# Altium PCB MotorDriver.PcbDoc
Units mil, origin at the board's own origin, x right, y up, seen from the top; angles counter-clockwise.
Board outline 1496.06 x 1495.77 mil, 4 copper layers (Top Layer, MidLayer1, MidLayer2, Bottom Layer); 75 components, 49 nets, 241 pads, 83 vias.
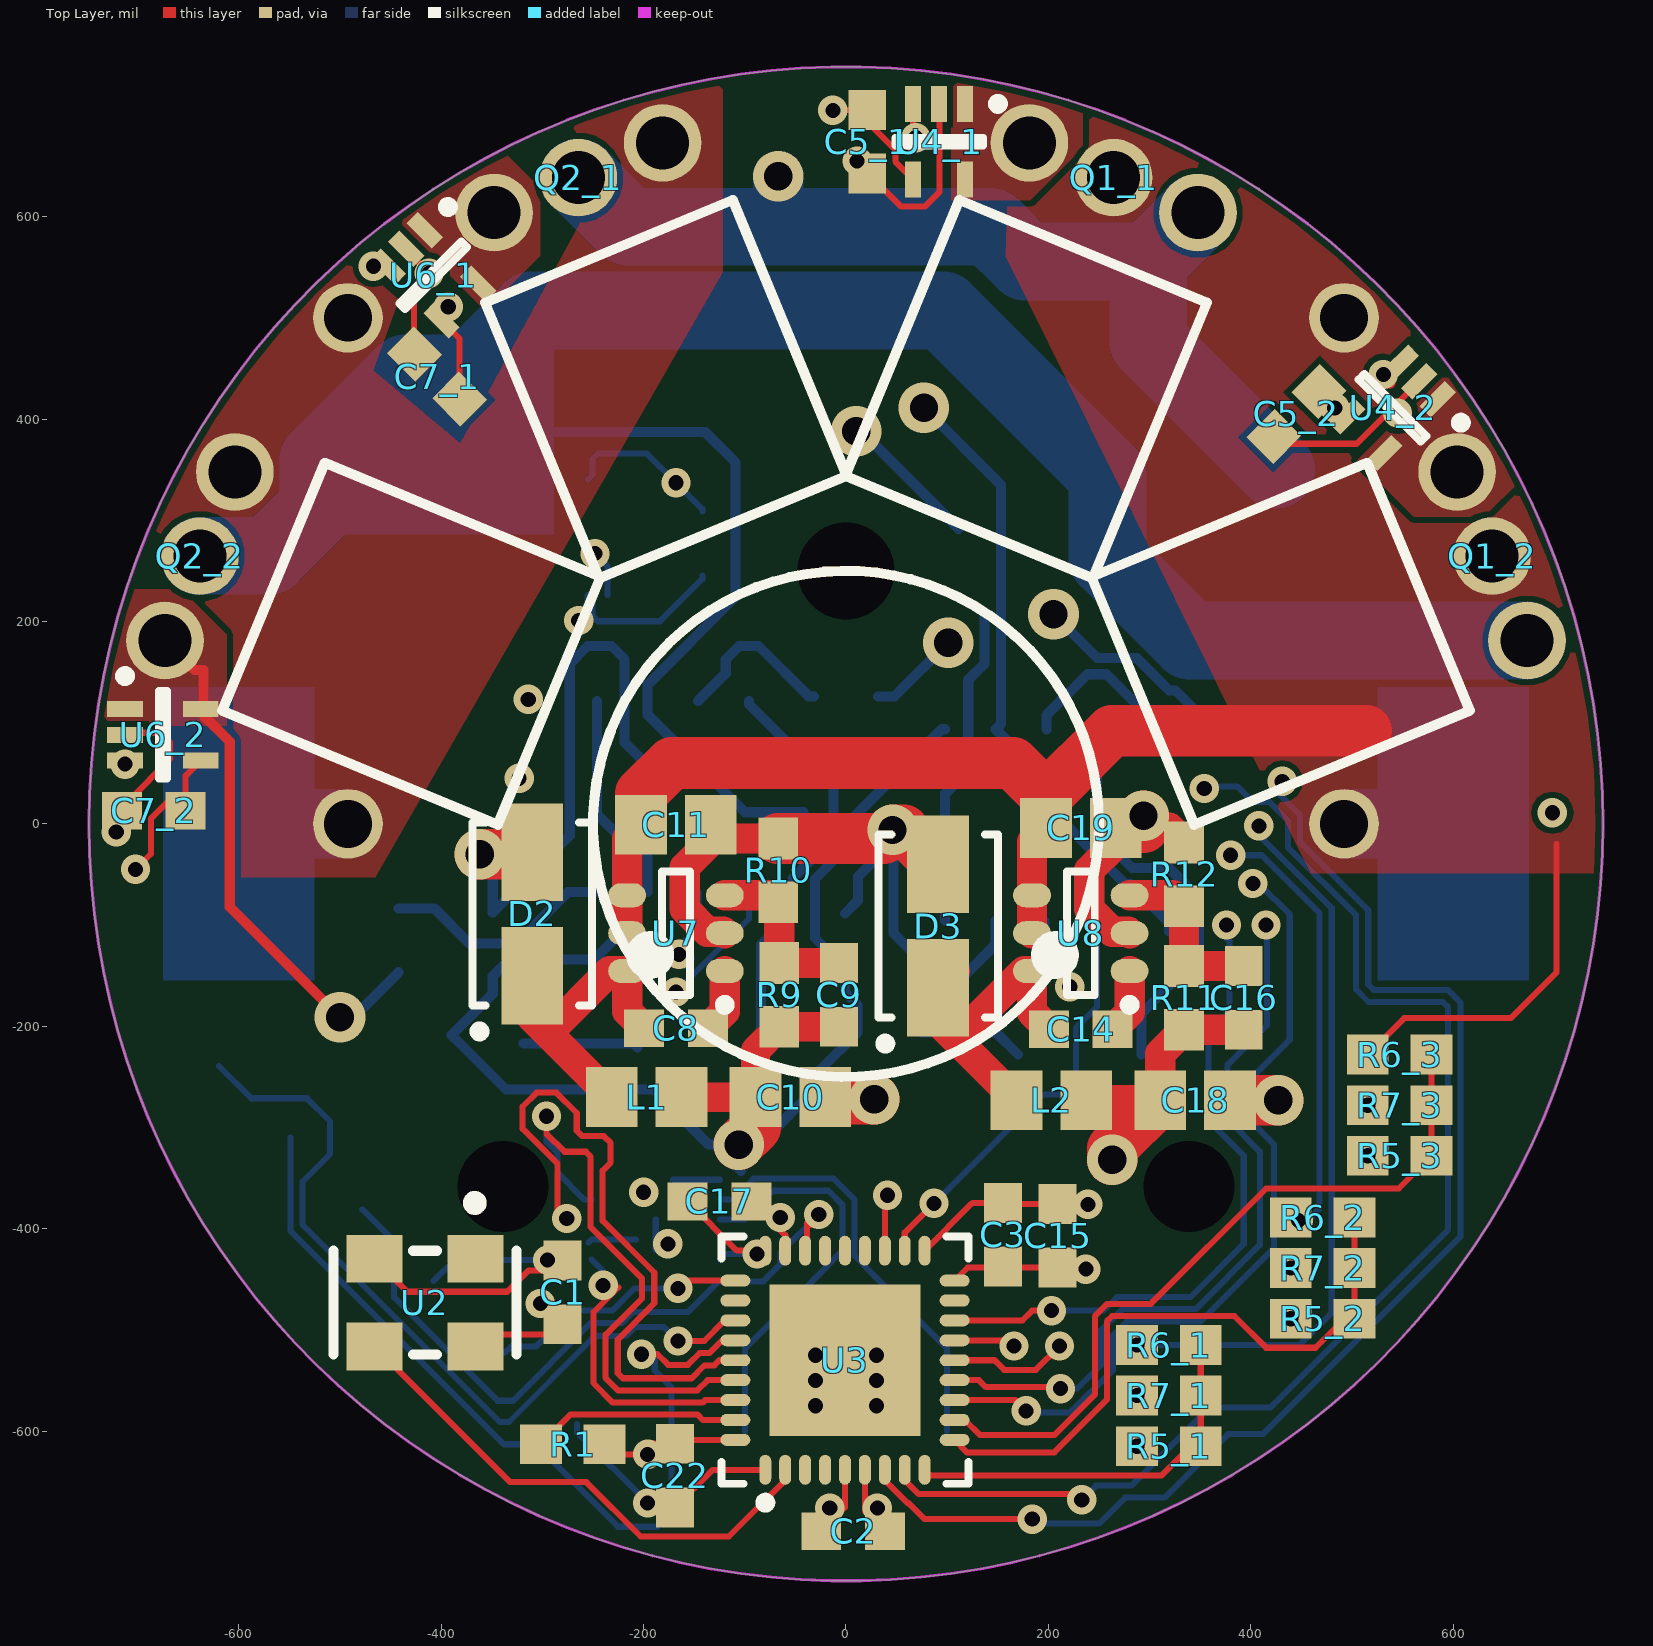
[diagram p0: Top Layer view]
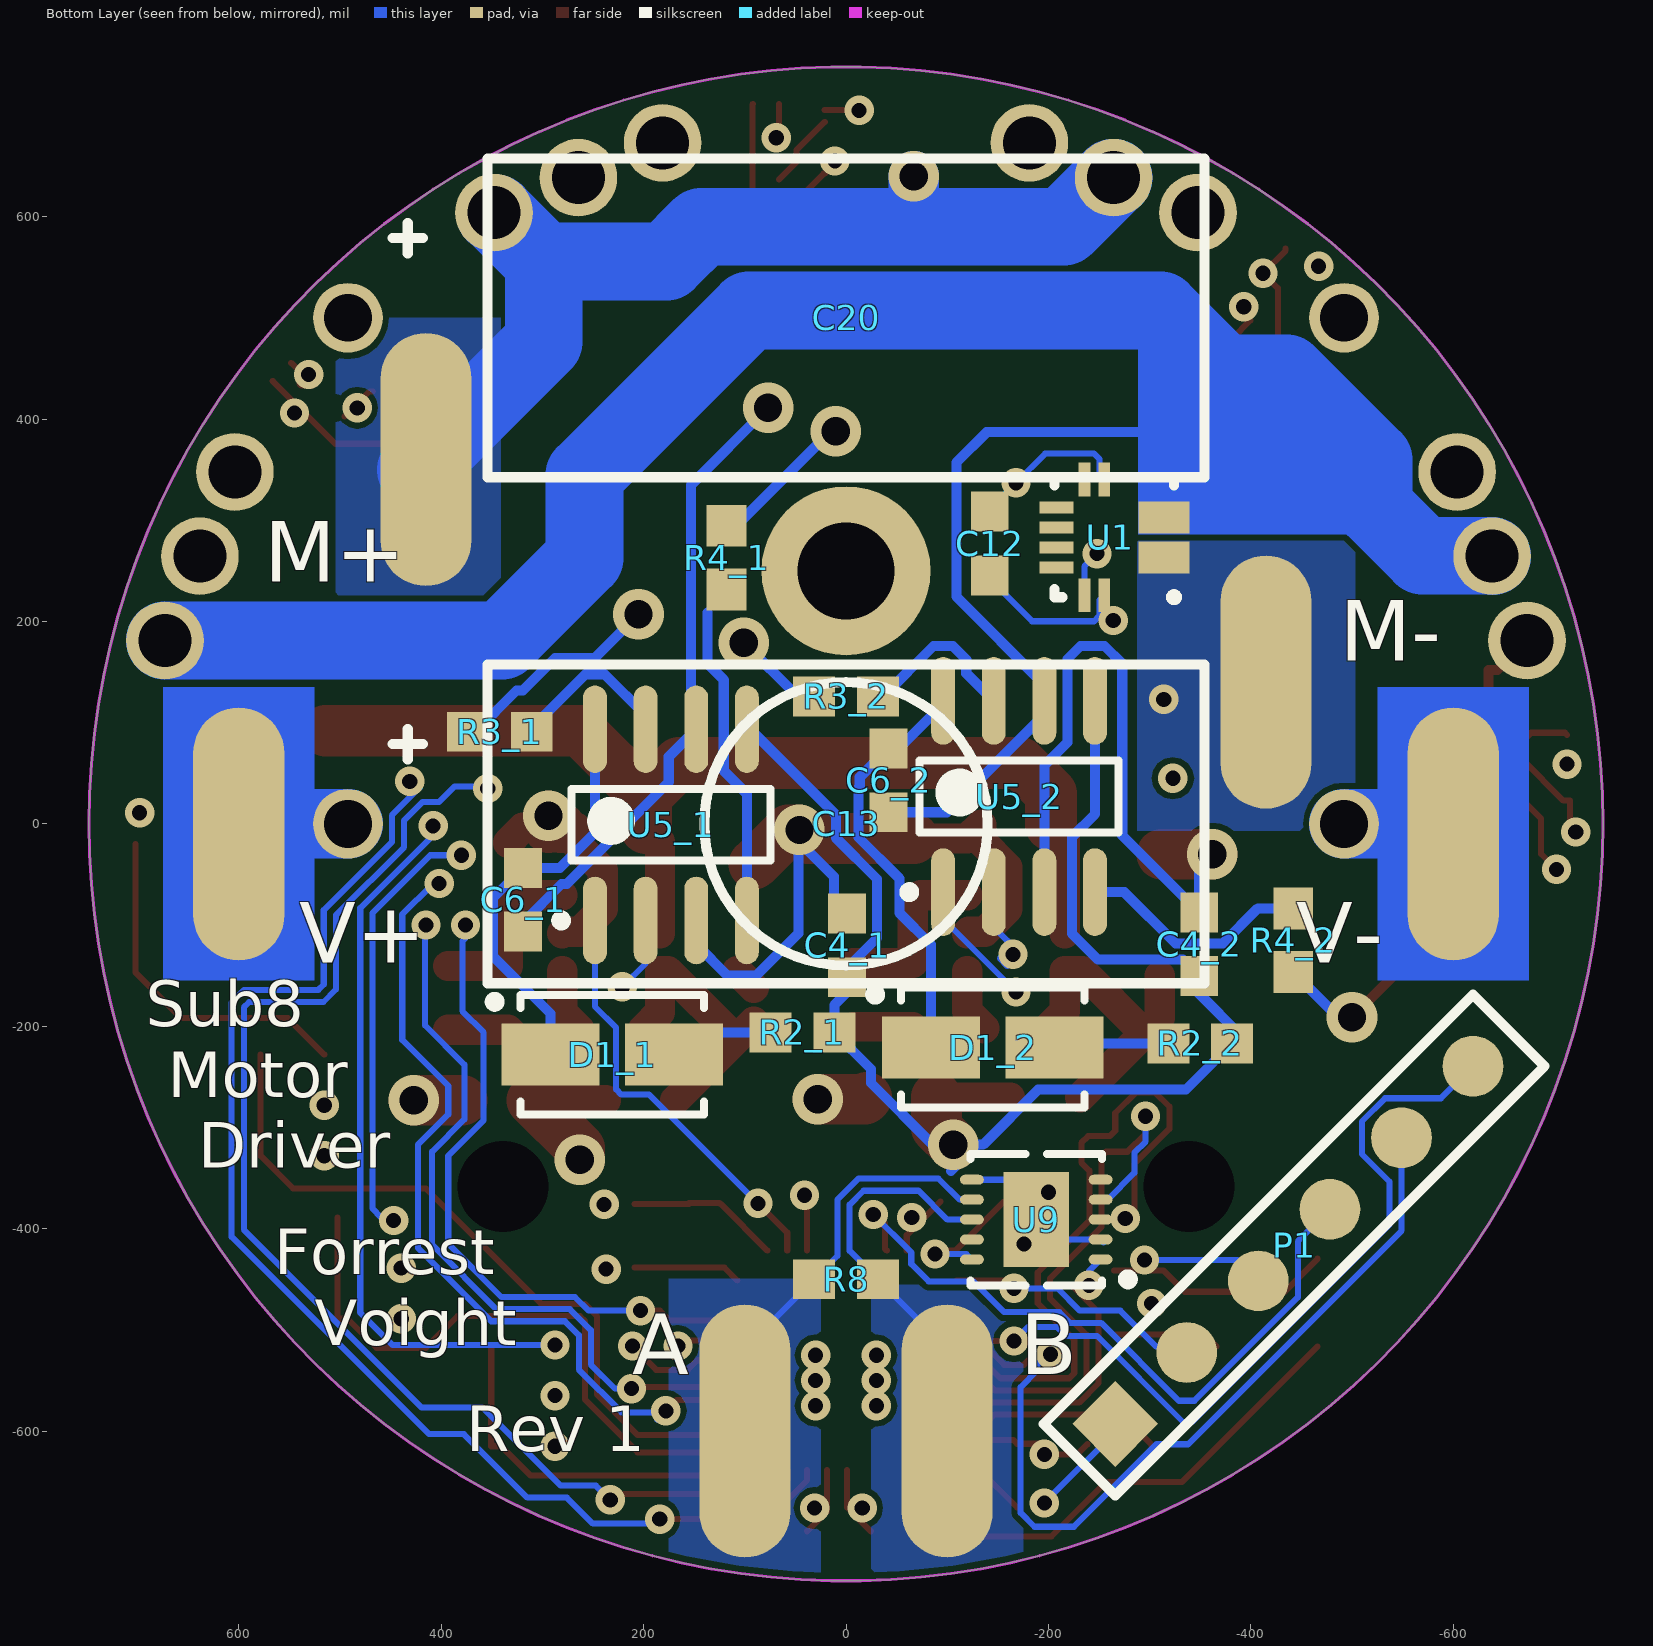
[diagram p1: Bottom Layer view, seen from below]
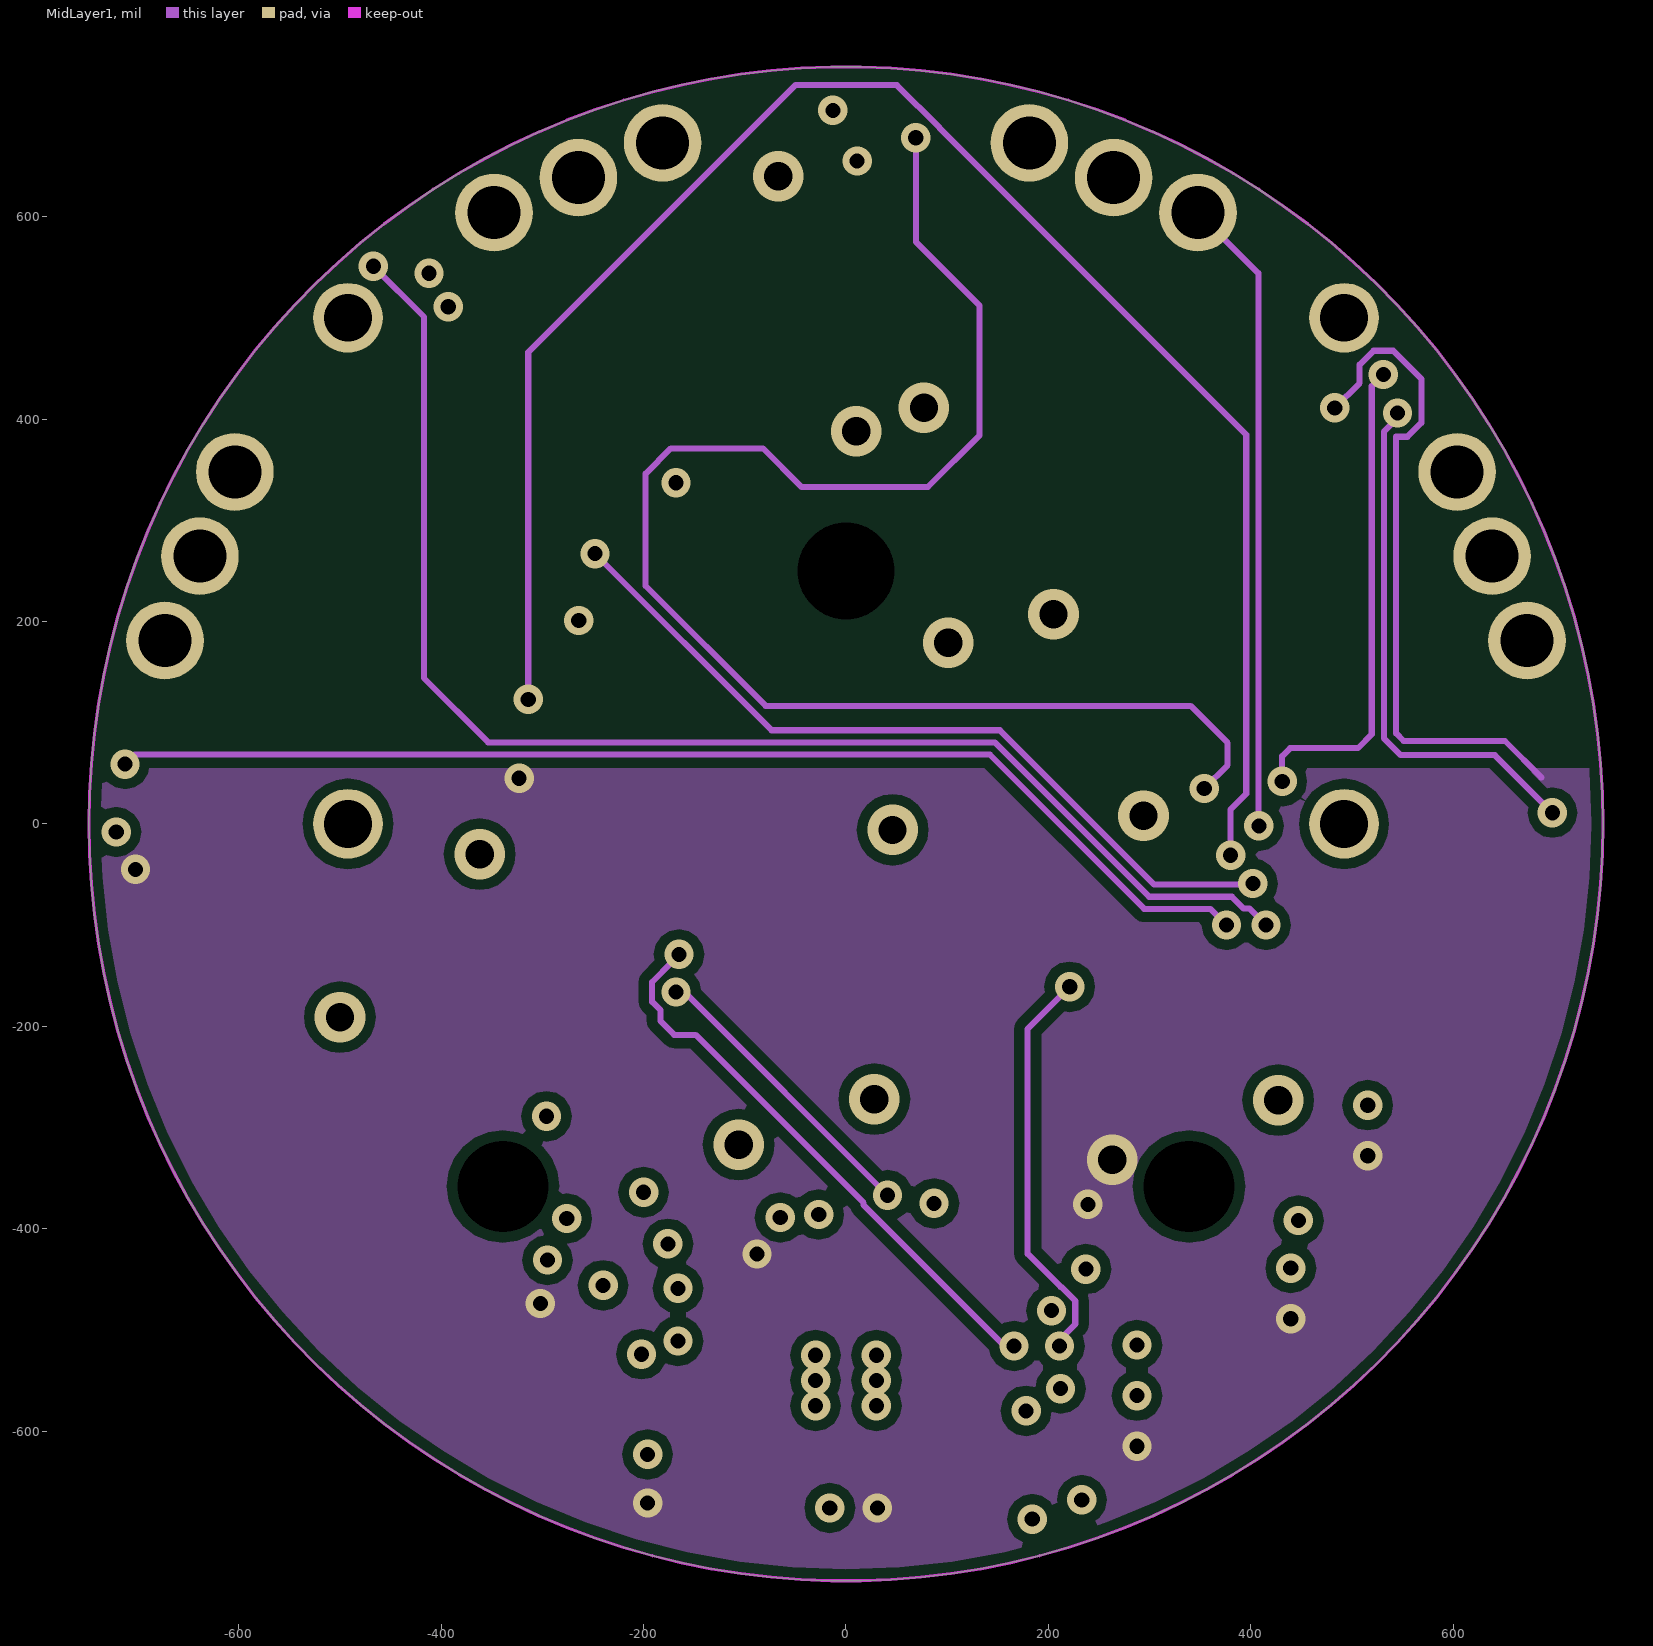
[diagram p2: MidLayer1]
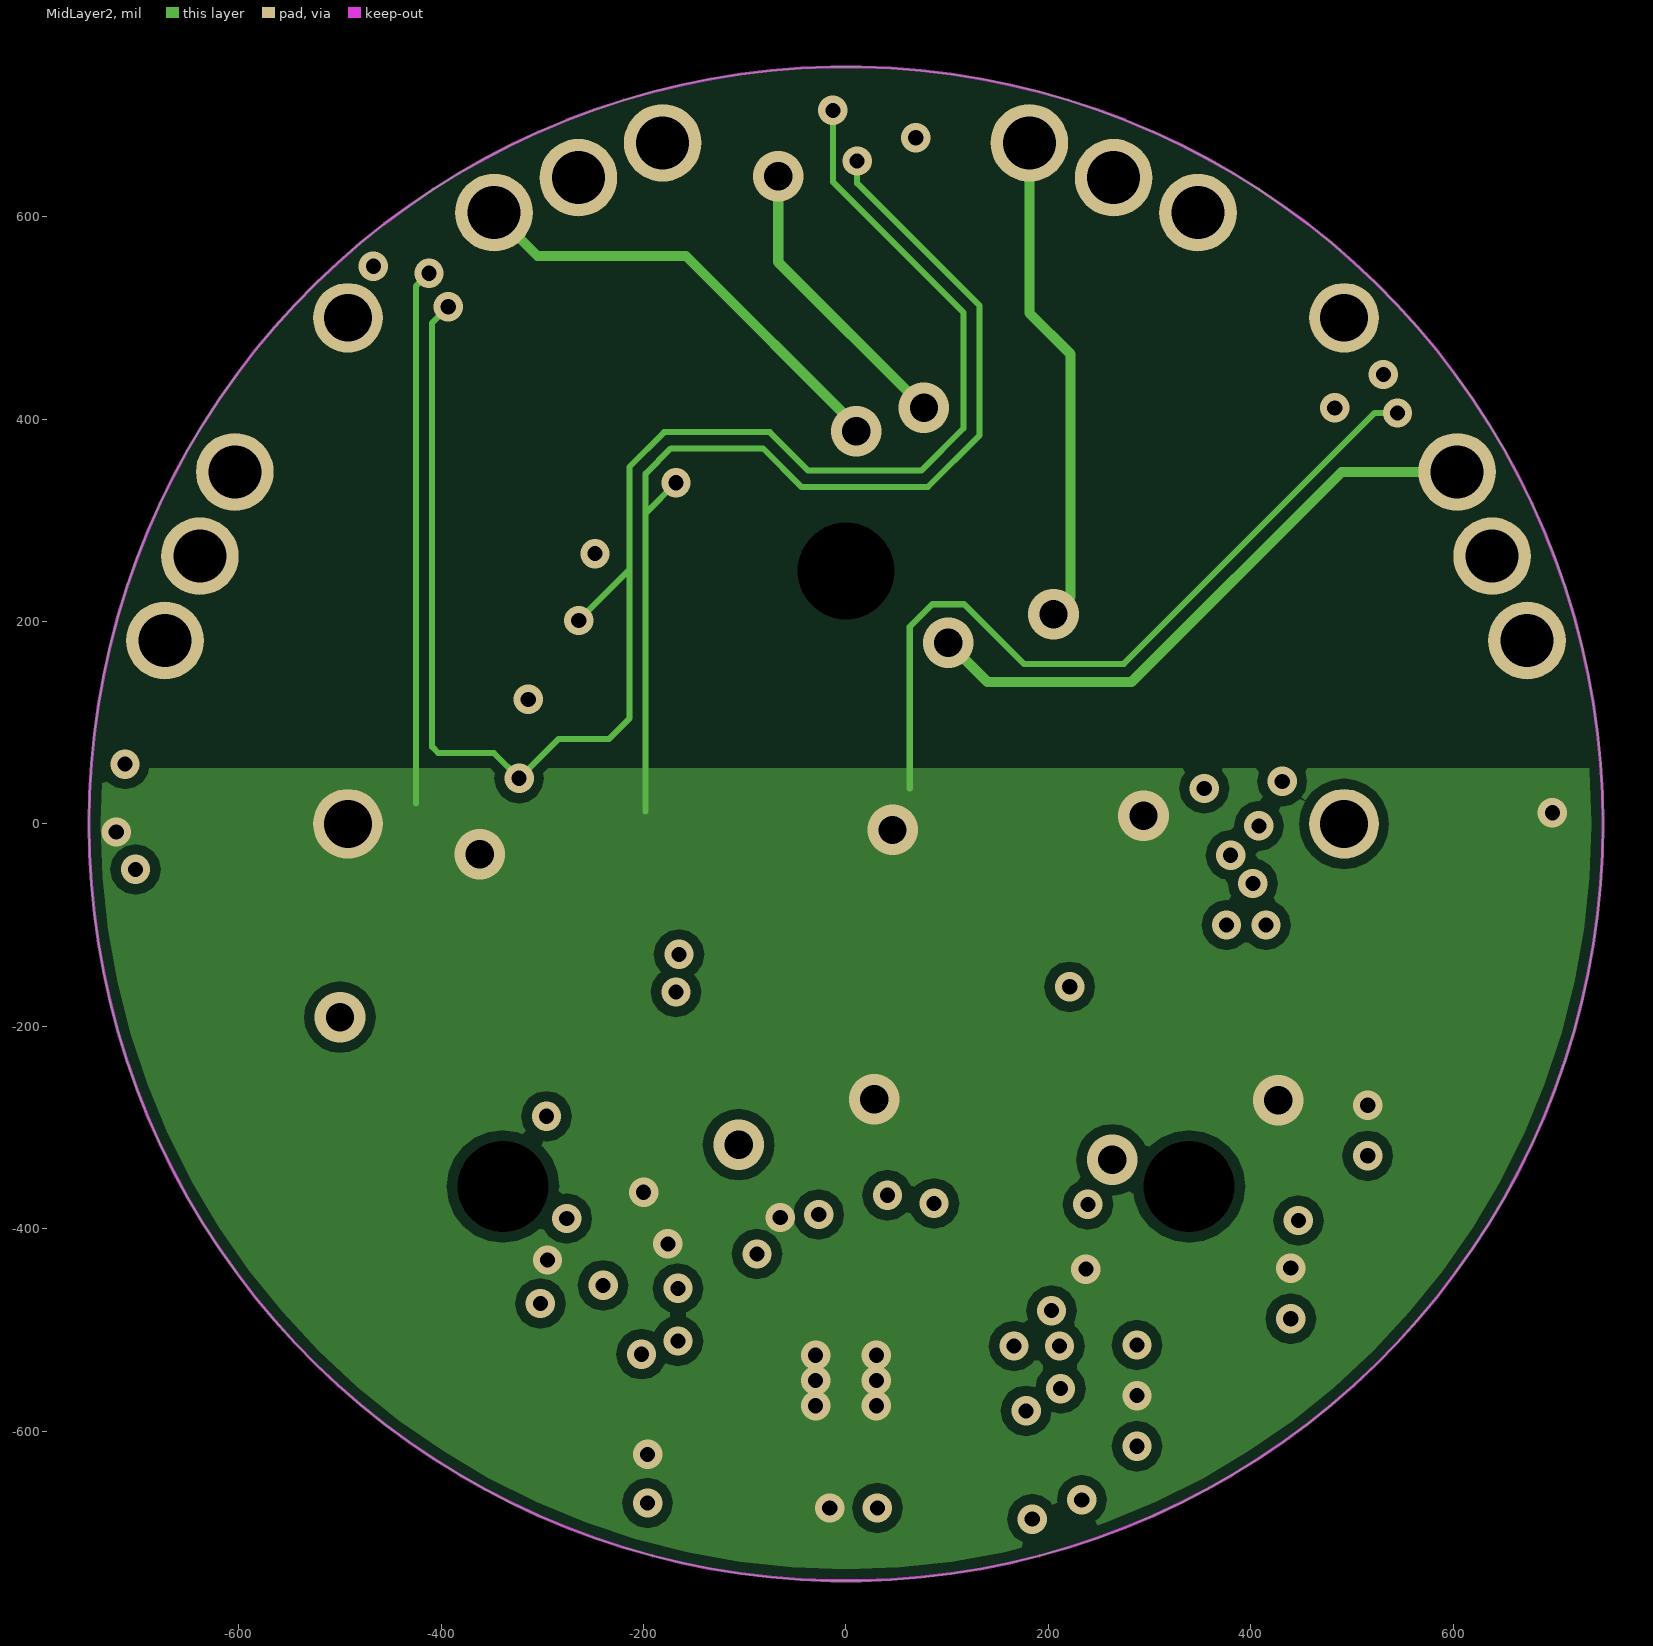
[diagram p3: MidLayer2]

## Layer stack, top to bottom
Top Layer: signal copper 1.4
Dielectric: core 12.6, FR-4, Dk 4.8
MidLayer1: signal copper 1.4
Dielectric: prepreg 12.6, FR-4, Dk 4.8
MidLayer2: signal copper 1.4
Dielectric: core 12.6, FR-4, Dk 4.8
Bottom Layer: signal copper 1.4

## Board outline
-748.03,0 ccw(c0,0) 748.03,0 ccw(c0,0)

## Design rules (kind name [scope] priority, off if disabled: settings)
Clearance Clearance_2 [(InNet('3V3') AND OnLayer('MidLayer1') AND NOT (IsTrack OR ISVia))] p1: gap=10
Clearance Clearance_1 [(InNet('GND') AND OnLayer('MidLayer2') AND NOT (IsTrack OR ISVia))] p2: gap=10
Clearance [All] p3: gap=6
ComponentClearance ComponentClearance_1 [InComponent('P1')] p1: gap=-10000 collisioncheckmode=3 verticalgap=-10000 showdistances=FALSE
ComponentClearance [All] p2: gap=0 collisioncheckmode=3 verticalgap=10 showdistances=TRUE
Height [All] p1: minheight=0 maxheight=426.4 prefheight=200
HoleSize [All] p1: absolutevalues=TRUE maxlimit=1000 minlimit=15 maxpercent=80.000 minpercent=20.000
MinimumSolderMaskSliver [All] p1: minsoldermaskwidth=0
PlaneConnect [All] p1: planeconnectstyle=Direct reliefexpansion=20 reliefentries=4 reliefconductorwidth=10 reliefairgap=10
PolygonConnect [All] p1: connectstyle=Direct reliefconductorwidth=10 reliefentries=4 polygonreliefangle="90 Angle"
RoutingVias [All] p1: holewidth=15 width=29 viastyle="Through Hole" minholewidth=15 minwidth=29 maxholewidth=28 maxwidth=50
SilkscreenOverComponentPads [All] p1: minsilkscreentomaskgap=0
SolderMaskExpansion SolderMaskExpansion_via [IsVia] p1: expansion=-10000
SolderMaskExpansion [All] p2: expansion=2
Width [All] p1: maxlimit=1000 minlimit=6 preferedwidth=10
22 further rules are at their usual default settings.

## Classes and differential pairs
component class U_RS485: R8 U9
component class HVS3: R5_3 R6_3 R7_3
component class MotorDriver: A B C13 C20 M+ M- V+ V-
component class HVS1: R5_1 R6_1 R7_1
component class HVS2: R5_2 R6_2 R7_2
component class U_CPU: C1 C2 C3 C15 C17 C22 P1 R1 U2 U3
component class U_HalfBridge1: C4_1 C5_1 C6_1 C7_1 D1_1 Q1_1 Q2_1 R2_1 R3_1 R4_1 U4_1 U5_1 U6_1
component class U_HalfBridge2: C4_2 C5_2 C6_2 C7_2 D1_2 Q1_2 Q2_2 R2_2 R3_2 R4_2 U4_2 U5_2 U6_2
channel class HalfBridge: U_HalfBridge1 U_HalfBridge2
channel class HighVoltageSensor: HVS1 HVS2 HVS3
component class U_Power: C8 C9 C10 C11 C14 C16 C18 C19 D2 D3 L1 L2 R9 R10 R11 R12 U7 U8
component class U_BiDirCurrentSensor: C12 U1

## Components (designator, comment, footprint, x,y, rotation, side; value= is the part's Value field where it differs from the comment)
A "SINGLE_SMD_PAD" SINGLE_SMD_PAD 100,-600 r90 bottom
B "SINGLE_SMD_PAD" SINGLE_SMD_PAD -100,-600 r90 bottom
C1 "Cap" CAPC0603 -280,-463 r90 top
C2 "Cap" CAPC0603 7,-699 r180 top
C3 "Cap" CAPC0603 155,-406 r270 top
C4_1 "Cap" CAPC0603 -1,-120 r90 bottom (schematic designator C4)
C4_2 "Cap" CAPC0603 -349,-119 r90 bottom (schematic designator C4)
C5_1 "Cap" CAPC0603 21,674 r90 top (schematic designator C5)
C5_2 "Cap" CAPC0603 445,405 r45 top (schematic designator C5)
C6_1 "Cap" CAPC0603 319,-75 r270 bottom (schematic designator C6)
C6_2 "Cap" CAPC0603 -42,43 r270 bottom (schematic designator C6)
C7_1 "Cap" CAPC0603 -404,442 r135 top (schematic designator C7)
C7_2 "Cap" CAPC0603 -684,13 r180 top (schematic designator C7)
C8 "Cap" CAPC0603 -168,-202 r180 top
C9 "Cap" CAPC0603 -7,-169 r270 top
C10 "Cap" CAPC0805 -55,-270 r0 top
C11 "Cap" CAPC0805 -168,-1 r0 top
C12 "Cap" CAPC0603 -142,277 r270 bottom
C13 "MAL202137151E3" MAL202137151E3 0,0 r180 bottom
C14 "Cap" CAPC0603 232,-203 r180 top
C15 "Cap" CAPC0603 209,-407 r270 top
C16 "Cap" CAPC0603 393,-172 r270 top
C17 "Cap" CAPC0603 -125,-373 r0 top
C18 "Cap" CAPC0805 345,-273 r0 top
C19 "Cap" CAPC0805 232,-4 r0 top
C20 "MAL202137151E3" MAL202137151E3 0,500 r180 bottom
C22 "Cap" CAPC0603 -169,-644 r90 top
D1_1 "US1K-13-F" US1K-13-F 231,-228 r180 bottom (schematic designator D1)
D1_2 "US1K-13-F" US1K-13-F -145,-221 r180 bottom (schematic designator D1)
D2 "Schottky" US1K-13-F -310,-89 r90 top
D3 "Schottky" US1K-13-F 91,-101 r90 top
L1 "Inductor" CAPC0805 -197,-270 r0 top
L2 "Inductor" CAPC0805 203,-273 r0 top
M+ "SINGLE_SMD_PAD" SINGLE_SMD_PAD 415,360 r90 bottom
M- "SINGLE_SMD_PAD" SINGLE_SMD_PAD -415,140 r90 bottom
P1 "SWD" SWD_STM32_SMD -266,-593 r45 bottom
Q1_1 "IRLU3636PbF" IRLU3636PbF 264.45,638.44 r247.5 top (schematic designator Q1)
Q1_2 "IRLU3636PbF" IRLU3636PbF 638.44,264.45 r202.5 top (schematic designator Q1)
Q2_1 "IRLU3636PbF" IRLU3636PbF -264.45,638.44 r292.5 top (schematic designator Q2)
Q2_2 "IRLU3636PbF" IRLU3636PbF -638.44,264.45 r337.5 top (schematic designator Q2)
R1 "Res" RES0603 -270,-613 r0 top
R2_1 "Res" RES0603 43,-206 r0 bottom (schematic designator R2)
R2_2 "Res" RES0603 -350,-217 r0 bottom (schematic designator R2)
R3_1 "Res" RES0603 342,91 r0 bottom (schematic designator R3)
R3_2 "Res" RES0603 0,126 r0 bottom (schematic designator R3)
R4_1 "Res" RES0603 118,263 r90 bottom (schematic designator R4)
R4_2 "Res" RES0603 -442,-115 r270 bottom (schematic designator R4)
R5_1 "Res" RES0603 319,-615 r0 top (schematic designator R5)
R5_2 "Res" RES0603 471,-489 r0 top (schematic designator R5)
R5_3 "Res" RES0603 547,-328 r0 top (schematic designator R5)
R6_1 "Res" RES0603 319,-515 r0 top (schematic designator R6)
R6_2 "Res" RES0603 471,-389 r0 top (schematic designator R6)
R6_3 "Res" RES0603 547,-228 r0 top (schematic designator R6)
R7_1 "Res" RES0603 319,-565 r180 top (schematic designator R7)
R7_2 "Res" RES0603 471,-439 r180 top (schematic designator R7)
R7_3 "Res" RES0603 547,-278 r180 top (schematic designator R7)
R8 "Res" RES0603 0,-450 r0 bottom
R9 "Res" RES0603 -66,-169 r90 top
R10 "Res" RES0603 -67,-46 r90 top
R11 "Res" RES0603 334,-172 r90 top
R12 "Res" RES0603 334,-50 r90 top
U1 "ACS711EEXLT" ACS711KEXLT -265,283 r0 bottom
U2 "636L3C008M" 636L3C -416,-473 r180 top
U3 "STM32F103TBU6" STM32F103TBU6_NO_VIAS -1,-530 r90 top
U4_1 "MCP9701" MCP9701AT-E/LT 92,674 r270 top (schematic designator U4)
U4_2 "MCP9701" MCP9701AT-E/LT 540,411 r225 top (schematic designator U4)
U5_1 "IR2183" IR2183S 173,-1 r90 bottom (schematic designator U5)
U5_2 "IR2183" IR2183S -171,27 r90 bottom (schematic designator U5)
U6_1 "MCP9701" MCP9701AT-E/LT -408,542 r315 top (schematic designator U6)
U6_2 "MCP9701" MCP9701AT-E/LT -675,88 r0 top (schematic designator U6)
U7 "BD9G101G" BD9G101G -168,-108 r180 top
U8 "BD9G101G" BD9G101G 232,-108 r180 top
U9 "ISL3179EFRZ" ISL3179EFRZ_NO_VIAS -188,-391 r0 bottom
V+ "SINGLE_SMD_PAD" SINGLE_SMD_PAD 600,-10 r90 bottom
V- "SINGLE_SMD_PAD" SINGLE_SMD_PAD -600,-10 r90 bottom

## Footprints (in the part's own frame and the unit in brackets; to place one, negate y for a bottom-side part, rotate by r counter-clockwise, add the part's x,y. Pads: shape width x height; smd on the part's side, far side on the other; paste and mask are expansions set on the pad)
636L3C [mm]
  rect 1.4x1.2 smd: 1(-1.27,-1.1) 2(1.27,-1.1) 3(1.27,1.1) 4(-1.27,1.1)
  silkscreen extent -2.3,-2.65 2.3,1.3, body extent -2.5,-1.6 2.5,1.6, height 2
ACS711KEXLT [mm]
  rect 1.27x0.8 smd: 1(-1.25,0.5) 3(-1.25,-0.5)
  rect 0.3x0.85 smd: 5(0.25,-1.45) 6(0.75,-1.45) 11(0.75,1.45) 12(0.25,1.45)
  rect 0.85x0.3 smd: 7(1.45,-0.75) 8(1.45,-0.25) 9(1.45,0.25) 10(1.45,0.75)
  silkscreen extent -1.6,-1.5 1.5,1.6, body extent -1.5,-1.5 1.5,1.5, height 0.75
BD9G101G [mm] "Simple Step-down Switching Regulators with Built-in Power MOSFET"
  oval 0.95x0.6 smd: 1(-1.225,0.95) 2(-1.225,0) 3(-1.225,-0.95) 4(1.225,-0.95) 5(1.225,0) 6(1.225,0.95)
  silkscreen extent -1.35,-1.55 0.95,1.92, body extent -0.9,-1.55 0.9,1.55, height 1.25
CAPC0603 [mm] "Chip Capacitor, 2-Leads, Body 1.60x0.80mm, IPC Medium Density"
  rect 1x0.95 smd: 1(-0.8,0) 2(0.8,0)
  body extent -0.88,-0.48 0.87,0.48, height 0.8
CAPC0805 [mm] "Chip Capacitor, 2-Leads, Body 2.01x1.25mm, IPC Medium Density"
  rect 1.3x1.5 smd: 1(-0.875,0) 2(0.875,0)
  body extent -1.11,-0.72 1.1,0.72, height 1.8
IR2183S [mm]
  oval 2.2x0.6 smd: 1(-2.4,1.905) 2(-2.4,0.635) 3(-2.4,-0.635) 4(-2.4,-1.905) 5(2.4,-1.905) 6(2.4,-0.635) 7(2.4,0.635) 8(2.4,1.905)
  silkscreen extent -2.52,-2.5 0.9,2.88, body extent -2,-2.5 2,2.5, height 1.75
IRLU3636PbF [mm]
  round 1.95 hole 1.33: D(0,0) G(0,-2.29) S(0,2.29)
  silkscreen extent 2,-3.36 9.49,3.37, body extent 2.03,-3.3 9.4,3.3, height 2.39
ISL3179EFRZ_NO_VIAS [mm] "TXRX ESD 3.3V RS-485/422 10-DFN"
  oval 0.6x0.25 smd mask+0.07: 1(-1.615,1) 2(-1.615,0.5) 3(-1.615,0) 4(-1.615,-0.5) 5(-1.615,-1) 6(1.615,-1) 7(1.615,-0.5) 8(1.615,0) 9(1.615,0.5) 10(1.615,1)
  rect 1.64x2.38 smd mask+0.07: 6(0,0)
  silkscreen extent -2.42,-1.65 1.65,1.65, body extent -1.5,-1.5 1.5,1.5, height 0.9
MAL202137151E3 [mm]
  round 1.75 hole 1.2: +(-12.5,0) -(12.5,0)
  silkscreen extent -11.38,-4 9,4, body extent -9,-4 9,4, height 9.91
MCP9701AT-E/LT [mm] "SOT23, 5-Leads, Body 2.3x2.4mm (max), Pitch 0.65mm, IPC Medium Density"
  rect 0.9x0.4 smd: 1(-0.95,0.65) 2(-0.95,0) 3(-0.95,-0.65) 4(0.95,-0.65) 5(0.95,0.65)
  silkscreen extent -1.07,-1.1 0.1,1.6, body extent -0.67,-1.12 0.67,1.13, height 1.1
RES0603 [mm] "Chip Resistor, 2-Leads, Body 1.60x0.80mm, IPC Medium Density"
  rect 1.05x1 smd: 1(-0.8,0) 2(0.8,0)
  body extent -0.88,-0.48 0.87,0.47, height 0.8
SINGLE_SMD_PAD [mil]
  oval 250x90 smd: 0(0,0)
STM32F103TBU6_NO_VIAS [mm] "MCU ARM 32BIT 128KB 36VFQFPN"
  oval 0.75x0.3 smd mask+0.07: 1(-2.75,2) 2(-2.75,1.5) 3(-2.75,1) 4(-2.75,0.5) 5(-2.75,0) 6(-2.75,-0.5) 7(-2.75,-1) 8(-2.75,-1.5) 9(-2.75,-2) 19(2.75,-2) 20(2.75,-1.5) 21(2.75,-1) 22(2.75,-0.5) 23(2.75,0) 24(2.75,0.5) 25(2.75,1) 26(2.75,1.5) 27(2.75,2)
  oval 0.3x0.75 smd mask+0.07: 10(-2,-2.75) 11(-1.5,-2.75) 12(-1,-2.75) 13(-0.5,-2.75) 14(0,-2.75) 15(0.5,-2.75) 16(1,-2.75) 17(1.5,-2.75) 18(2,-2.75) 28(2,2.75) 29(1.5,2.75) 30(1,2.75) 31(0.5,2.75) 32(0,2.75) 33(-0.5,2.75) 34(-1,2.75) 35(-1.5,2.75) 36(-2,2.75)
  rect 3.8x3.8 smd mask+0.07: 37(0,0)
  silkscreen extent -3.7,-3.1 3.1,3.1, body extent -3.06,-3.06 3.06,3.06, height 1
SWD_STM32_SMD [mil] "SWD connector matching the pinout on STM Discovery Boards"
  rect 60x60 smd: 1(0,0)
  round 60 smd: 2(0,-100) 3(0,-200) 4(0,-300) 5(0,-400) 6(0,-500)
  silkscreen extent -50,-550 50,50
US1K-13-F [mm] "Molded Diode, 2-Leads, Body 4.3x2.6mm, IPC Medium Density"
  rect 2.45x1.55 smd: A(1.55,0) C(-1.55,0)
  silkscreen extent -3.08,-1.5 2.3,1.5, body extent -2.3,-1.46 2.3,1.46, height 2.3

## Part data
C13 C20: "CAP ALUM 150UF 40V 20% AXIAL"
D1_1 D1_2: "1.0A SURFACE MOUNT ULTRA-FAST RECTIFIER"
D2 D3: "Schottky Diode Template"
P1: library part SWD_STM32, "SWD connector matching the pinout on STM Discovery Boards"
Q1_1 Q1_2 Q2_1 Q2_2: "HEXFET Power MOSFET"
U1: "Hall Effect Linear Current Sensor with Overcurrent  Fault Output for < 100 V Isolation Applications"
U2: library part 636L3C, "HCMOS/TTL Clock Oscillator"
U3: "MCU ARM 32BIT 32K FLASH 36VFQFP"
U4_1 U4_2 U6_1 U6_2: library part MCP9701AT-E/LT, "Low-Power Linear Active Thermistor ICs"
U5_1 U5_2: "Half-Bridge Driver"
U7 U8: "Simple Step-down Switching Regulators with Built-in Power MOSFET"
U9: "TXRX ESD 3.3V RS-485/422 10-DFN"

## Free pads (board coordinates)
  round 0 hole 90: black_wire(-339,-358.28) red_wire(339,-358.28)
  round 0 / inner round 0 / far side round 167 hole 96: heatsink(0,250)

## Via types
v1: diameter 29, hole 15, Top Layer to Bottom Layer, 70 vias
v2: diameter 50, hole 28, Top Layer to Bottom Layer, 13 vias

## Nets (pads, with @x,y where several pads share a name; then routed paths per layer and width w, separated by ;. In a path a pad name is that pad's centre, name@x,y a point inside that pad or via, vN(x,y) a via of type N, cw(c..) or ccw(c..) an arc to the next point about the centre after c; other vN are vias at no path point)
3V3: C1.1 C2.1 C3.1 C5_1.2 C5_2.2 C7_1.1 C7_2.1 C12.2 C15.1 C16.2 C17.1 C18.1 C22.1 L2.2 P1.1 R5_1.1 R5_2.1 R5_3.1 R11.1 U1.12 U2.4 U3.1 U3.6 U3.19 U3.27 U4_1.4 U4_2.4 U6_1.4 U6_2.4 U9.10 | length 3944.7
  Top Layer w6: v1(-702,-45) -686.81,-29.81 -686.81,5.19 -669,23 -652.5,23 -652.5,47.5 U6_2.4 ; v1(-393,511) -393,504.1 U6_1.4 -381.73,479.54 C7_1.1 ; U2.4 -354.19,-504.5 C1.1@-265,-504.5 ; C22.1 -131.77,-638.27 U3.1 ; C17.1 -107.76,-421.73 U3.27 ; v1(-13,705) -12.5,705.5 C5_1.2 ; U3.6 18.69,-679.19 C2.1 ; C5_1.2@21,693.62 48.7,665.92 48.7,654.31 U4_1.4 ; U3.19 123.97,-375.5 ; 124.97,-374.5 C3.1 ; C3.1@155,-375.5 C15.1 ; C5_2.2 470.84,427.27 U4_2.4
  Top Layer w30: L2.2 C18.1 310.55,-226.94 R11.1 C16.2
  Top Layer w50: v2(263,-332) 263,-320.55 C18.1
  MidLayer1 w6: v1@-13,695.89 v1(-13,705) ; v1(483,411) 507.5,435.5 507.5,453.73 521.27,467.5 540.73,467.5 568.5,439.73 568.5,396.27 554.73,382.5 543.5,382.5 543.5,89.5 551.12,81.88 651.12,81.88 687,46
  MidLayer2 w6: v1(-393,511) -409,495 -409,76 -403,70 -348,70 v1(-323,45) -284,84 -234,84 -214,104 -214,251 ; v1(-264,201) -214,251 ; v1(-13,705) -13,634.37 116,505.37 116,390.63 74.37,349 -37.37,349 -75.37,387 -179.63,387 -214,352.63 -214,251
  Bottom Layer w6: P1.1 -266,-601 v1(-196,-671) ; v1(-264,201) -255.16,209.84 U1.12 -250.38,221.14 -250.38,205.45 -245.11,200.18 -183.82,200.18 -142,242 C12.2 ; U9.10 -119.05,-425 v1(-88,-425)
  other v1: 31,-676 287.51,-615 439.5,-489 -302,-474 239,-376 515.5,-328
15V: C4_1.1 C4_2.1 C9.2 C10.1 L1.2 R2_1.1 R2_2.1 R9.1 U5_1.5 U5_2.5 | length 1632.1
  Top Layer w29: L1.2 C10.1 -89.45,-223.95 R9.1 C9.2
  Top Layer w50: v2(-106,-317) -89.45,-300.45 C10.1
  Bottom Layer w10: U5_2.5 -246,9.63 -223.19,-13.18 -223.19,-108.43 -248.95,-134.19 -332.69,-134.19 C4_2.1 -349,-168 -389.75,-208.75 R2_2.1 -335.99,-262.51 -190,-262.51 -135.51,-317 v2@-129.64,-317 ; -103.68,-342.96 v2@-129.64,-317 ; U5_1.5 94.58,93.49 10,8.91 10,-13.75 -30.7,-54.45 -30.7,-112.75 -1,-142.45 C4_1.1 -1,-166.5 11.5,-179 R2_1.1 -24.75,-242.25 -24.75,-256.07 -85.68,-317 v2(-106,-317) v2@-129.64,-317
ADC0: U3.7 U4_2.3 | length 1856.4
  Top Layer w6: U3.7 38.37,-648.52 61.15,-671.3 61.91,-671.3 77.61,-687 v1(184,-687) ; v1(531,444) v1@533.9,441.1 ; U4_2.3 v1@533.9,441.1 ; v1@533.9,441.1 540.07,434.93 538.14,433 527,433 525,435 527.81,435 v1@533.9,441.1
  MidLayer1 w6: v1@421,36 425,36 v1(431,42) 431,67 438.88,74.88 505.88,74.88 519.5,88.5 519.5,432.5 v1(531,444) v1@540.23,444
  Bottom Layer w6: v1(184,-687) 188.5,-691.5 250.11,-691.5 275.79,-665.82 314.91,-665.82 377.72,-603 412,-603 607,-408 607,-176.32 594.68,-164 521.27,-164 516,-158.73 516,-85.32 448.68,-18 448.68,8.32 421,36 425,36 v1(431,42)
ADC1: U3.8 U4_1.3 | length 2812.8
  Top Layer w6: U3.8 58.06,-648.52 71.57,-662.03 227.03,-662.03 v1(233,-668) ; U4_1.3 66.41,680.59 v1(69,678)
  MidLayer1 w6: v1(69,678) 69,575 132,512 132,384 81,333 -44,333 -82,371 -173,371 -198,346 -198,235 -79.5,116.5 340.5,116.5 377,80 377,58 v1(354,35)
  Bottom Layer w6: v1(233,-668) 247.18,-653.82 281.92,-653.82 359.24,-576.5 419.5,-576.5 595,-401 595,-181.29 589.71,-176 516.3,-176 504,-163.7 504,-90.29 436.68,-22.97 436.68,3.35 418.53,21.5 402.27,21.5 386.77,37 356,37 v1(354,35)
ADC2: R5_1.2 R6_1.2 R7_1.1 U3.9 | length 386.9
  Top Layer w6: U3.9 83.16,-643.68 311.9,-643.68 340.59,-615 R5_1.2 R7_1.1 R6_1.2
ADC3: R5_2.2 R6_2.2 R7_2.1 U3.10 | length 626.3
  Top Layer w6: U3.10 119.53,-621 205.83,-621 257.83,-569 257.83,-491.59 263.11,-486.31 383.74,-486.31 415.11,-517.69 463.9,-517.69 492.59,-489 R5_2.2 R6_2.2
ADC4: R5_3.2 R6_3.2 R7_3.1 U3.11 | length 737.1
  Top Layer w6: U3.11 117.52,-589.06 132.47,-604 205.86,-604 245.83,-564.03 245.83,-486.62 258.14,-474.31 301.11,-474.31 415.11,-360.31 546.18,-360.31 R5_3.2 R6_3.2
ADC5: U1.11 U3.12 | length 1661.9
  Top Layer w6: U3.12 167.37,-569.37 v1(178,-580)
  MidLayer1 w6: v1(-248,267) -73.5,92.5 152,92.5 304.5,-60 401,-60 v1(402,-59)
  Bottom Layer w6: v1(-248,267) -235.47,254.47 U1.11 ; v1(178,-580) v1@179.5,-581.5 ; v1@186.5,-588.5 v1@179.5,-581.5 ; v1(402,-59) 401,-60 409,-60 438.5,-89.5 438.5,-213.42 393,-258.92 393,-287.08 423,-317.08 423,-419 350.5,-491.5 277.77,-491.5 264.01,-505.27 264.01,-539.23 221.73,-581.5 v1@179.5,-581.5
ADC6: U3.13 U6_1.3 | length 2093.2
  Top Layer w6: U3.13@108.95,-548 U3.13 131.31,-549.68 138.13,-556.5 210.5,-556.5 v1(212,-558)
  MidLayer1 w6: v1(-467,551) -417,501 -417,144 -353.5,80.5 147.03,80.5 299.53,-72 381.23,-72 392.73,-83.5 398.5,-83.5 v1(415,-100)
  Bottom Layer w6: v1@212,-557.27 v1(212,-558) 228.26,-558 252.01,-534.26 252.01,-500.29 272.8,-479.5 345.53,-479.5 409,-416.03 409,-324 377,-292 377,-238 416,-199 v1@416,-100
ADC9: U3.16 U6_2.3 | length 1818.7
  Top Layer w6: U3.16 174.37,-490.63 184,-481 v1(203,-481)
  MidLayer1 w6: v1(-712.4,59) -702.9,68.5 142.06,68.5 294.56,-84 360,-84 v1(376,-100)
  Bottom Layer w6: v1(203,-481) 254.33,-481 267.83,-467.5 340.56,-467.5 393,-415.06 393,-328 358,-293 358,-206 379,-185 379,-116 376,-113 v1(376,-100)
CLK8MHZ: U2.3 U3.2 | length 517.1
  Top Layer w6: U2.3 -331.96,-650.35 -256.65,-650.35 -202.82,-704.18 -115.72,-704.18 -60.06,-648.52 U3.2
GND: C1.2 C2.2 C3.2 C4_1.2 C4_2.2 C5_1.1 C5_2.1 C7_1.2 C7_2.2 C10.2 C11.2 C12.1 C13.- C15.2 C17.2 C18.2 C19.2 C20.- C22.2 D2.A D3.A P1.3 Q2_1.S Q2_2.S R1.2 R7_1.2 R7_2.2 R7_3.2 R10.2 R12.2 U1.5 U2.2 U3.5 U3.18 U3.26 U3.36 U3.37 U4_1.2 U4_2.2 U5_1.3 U5_2.3 U6_1.2 U6_2.2 U7.2 U8.2 U9.2 U9.6 V-.0 | length 6505.7
  Top Layer w6: v1(-721,-8) -715.5,-2.5 C7_2.2 -715.5,23 -708.89,23 -668,63.89 -668,81 -677,90 -710.4,90 U6_2.2 ; U2.2 -433.38,-462.31 -334.71,-462.31 -313.9,-441.5 C1.2@-265,-441.5 ; U6_1.2 -434.45,566.45 v1(-412,544) -426.74,529.26 -426.74,464.74 C7_1.2 ; R1.2 -228.5,-623 v1(-196,-623) ; v1@-194.99,-612.5 C22.2 -165.24,-608.74 U3.36 ; C17.2 -60.06,-406.45 U3.26 ; C2.2 -1,-675.5 U3.5 ; C5_1.1@6.5,657 C5_1.1 22.18,642.5 54.81,609.88 78.01,609.88 92.5,624.37 92.5,710.9 U4_1.2 ; U3.18 120.03,-438.5 C15.2 ; C5_2.1 429.9,375.55 504.55,375.55 v1@545,416 ; v1@545,405 v1(545,406) v1@545,416 ; U4_2.2 v1@545,416
  Top Layer w30: U7.2 -121.17,-106.6 -137.06,-106.6 -159.47,-84.19 -159.47,-42.84 -133.55,-16.92 C11.2 -120.05,-14.5 R10.2 ; U8.2 278.83,-106.6 262.94,-106.6 240.53,-84.19 240.53,-45.84 266.45,-19.92 C19.2 C19.2@282,-4 ; C19.2@286,-4 294,-4 319.5,-4 R12.2
  Top Layer w50: v2(-362,-30) D2.A@-312.02,-30 ; R10.2 37.5,-14.5 v2(46,-6) 57.02,-6 D3.A ; C10.2 -18.55,-272 v2(28,-272) ; C19.2@282,-4 v2(294,8) v2@294,-4 ; C18.2 v2(427,-273)
  MidLayer1 w6: v1(545,406) 545,400.97 531.5,387.47 531.5,84.53 548.03,68 641,68 v1(698,11)
  MidLayer2 w6: -425,20 -425,531 v1(-412,544) ; -198,12 -198,307 ; v1(-168,337) -198,307 ; v1(11,655) 11,633 132,512 132,384 81,333 -44,333 -82,371 -173,371 -198,346 -198,307 ; 63,35 63,194.74 85.26,217 116.74,217 175.74,158 274.54,158 522.54,406 v1(545,406)
  Bottom Layer w6: P1.3 -386.84,-431 v1(-295,-431) ; U1.5 -250.38,344.86 -250.38,360.55 -245.11,365.82 -196.82,365.82 v1(-168,337) -142,311 C12.1 ; U9.2@-254.4,-413.5 U9.2 U9.6@-207.68,-410.68 ; U9.6@-188,-421.03 U9.6@-188,-391 ; U9.6@-171,-351.63 U9.6@-124.42,-351.63
  Bottom Layer w10: U5_2.3 -196,57.74 -218.81,80.55 -218.81,162.81 -231.8,175.8 -255.45,175.8 -273,158.24 -273,-11.5 C4_2.2 v2@-349,-30 ; C4_1.2 12,-75.5 12,-52 42,-22 v2@42,4 ; v2@47,-11 47,-108.24 88.55,-149.79 116.79,-149.79 117,-150 148,-119 U5_1.3 ; v2@-349,-30 -349,-17 v2(-362,-30) v2@-349,-30
  Bottom Layer w68.9: V-.0@-600,0 C13.-
  other v1: -16,-676 -30,-575 30,-575 287.51,-565 -30,-550 30,-550 -30,-525 30,-525 237,-440 439.5,-439 -176,-415 -65,-389 -200,-364 515.5,-278
JTCK/SWCLK: P1.2 U3.28 | length 256.9
  Top Layer w6: v1(-166,-459) -158.26,-451.26 U3.28
  Bottom Layer w6: P1.2 -330.92,-516.5 -306.5,-516.5 -271,-481 -231,-481 -209,-459 v1(-166,-459)
JTDI: U3.29
JTDO/SWO: P1.6 U3.30 | length 807.2
  Top Layer w6: v1(-166,-511) -140,-511 -119.63,-490.63 U3.30
  Bottom Layer w6: P1.6 -587.84,-271.16 -532.69,-271.16 -509.84,-294 -509.84,-326.31 -537,-353.47 -537,-396 -342,-591 -333,-591 -248,-506 -217.23,-506 -208.23,-497 -180,-497 v1(-166,-511)
JTMS/SWDIO: P1.4 U3.25 | length 692.6
  Top Layer w6: U3.25 -38.5,-419.86 -38.5,-394.5 -36.77,-396.23 -31.23,-396.23 -27,-392 v1(-27,-386)
  Bottom Layer w6: P1.4 -446.42,-412.58 -446.42,-467.73 -344.15,-570 -329,-570 -252,-493 -221.2,-493 -210.7,-482.5 -156.27,-482.5 -125.77,-452 -81.77,-452 -64.5,-434.73 -64.5,-423.5 v1(-27,-386)
NetA_0: A.0 R8.2 U9.7 | length 416.8
  Bottom Layer w6: U9.7 -112.23,-371.31 -91.42,-350.5 -12.3,-350.5 8.5,-371.3 8.5,-427 R8.2 100,-518.51 A.0
NetB_0: B.0 R8.1 U9.8 | length 402.1
  Bottom Layer w6: U9.8 -100.23,-391 -71.73,-362.5 -17.27,-362.5 -3.5,-376.27 -3.5,-422 R8.1 -100,-518.51 B.0
NetC6_1_1: C6_1.1 D1_1.C U5_1.8 | length 408
  Bottom Layer w10: U5_1.8 248,-8.91 282.59,-43.5 C6_1.1 348.7,-73.2 348.7,-130.74 292.02,-187.41 D1_1.C
NetC6_1_2: C6_1.2 M+.0 Q1_1.S Q2_1.D R6_1.1 U5_1.6 | length 3232.2
  MidLayer1 w6: Q1_1.S 407.5,544.18 407.5,-1.5 v1(408,-2)
  MidLayer2 w10: v2(-67,640) -67,555 v2(77,411)
  Bottom Layer w6: v1(287.51,-515) 448,-515 480,-483 480,-83.26 408,-11.26 v1(408,-2)
  Bottom Layer w10: v2(77,411) 153,335 153,98.49 U5_1.6 175.19,66.3 175.19,41.27 275.96,-59.5 281.06,-59.5 319,-97.45 C6_1.2
  Bottom Layer w50: -67,592 v2(-67,640)
  Bottom Layer w76.77: Q2_1.D -263.71,638.44 -215.27,590 143,590 177.33,555.67 298.74,555.67 ; Q1_1.S@346.91,603.1 346.17,603.1 298.74,555.67 ; M+.0@425,350 M+.0 298.74,476.26 298.74,555.67
NetC6_2_1: C6_2.1 D1_2.C U5_2.8 | length 412.7
  Bottom Layer w10: U5_2.8 -96,118.49 -52,74.5 C6_2.1 -13.56,46.06 -13.56,37.01 -12.3,35.75 -12.3,-13.42 -52.7,-53.83 -52.7,-87.95 -83.98,-119.22 D1_2.C
NetC6_2_2: C6_2.2 Q1_2.S Q2_2.D U1.3 U5_2.6 | length 2313.6
  Bottom Layer w10: -309,387 -139,387 -109,357 -109,224.56 -196,137.57 U5_2.6 -196,107.74 -99.76,11.5 C6_2.2
  Bottom Layer w76.77: Q2_2.D -637.92,264.97 -569.65,264.97 -521.17,313.46 -521.17,359.47 -435.64,445 -373,445 -310.77,507.23 95.77,507.23 258.33,344.67 258.33,262.67 339.84,181.16 Q1_2.S
NetC8_1: C8.1 U7.1 | length 63.5
  Top Layer w30: C8.1 -119.77,-185.27 U7.1
NetC8_2: C8.2 D2.C L1.1 U7.6 | length 319.9
  Top Layer w30: D2.C -310,-191.45 -294.72,-206.72 ; L1.1 -294.72,-206.72 ; C8.2 -216.23,-185.27 U7.6 -233.4,-145.4 -294.72,-206.72
NetC9_1: C9.1 R9.2 R10.1 U7.3 | length 175.1
  Top Layer w30: U7.3 -73.9,-70.6 R10.1 -66,-78.5 R9.2 C9.1
NetC14_1: C14.1 U8.1 | length 64.5
  Top Layer w30: C14.1 280.23,-186.27 U8.1
NetC14_2: C14.2 D3.C L2.1 U8.6 | length 300.9
  Top Layer w30: D3.C@91,-195.45 108.55,-213 ; D3.C D3.C@107.62,-145.4 ; L2.1 108.55,-213 ; C14.2 183.77,-186.27 U8.6 176.15,-145.4 108.55,-213
NetC16_1: C16.1 R11.2 R12.1 U8.3 | length 176.3
  Top Layer w30: U8.3 323.1,-70.6 R12.1 R11.2 C16.1
NetD1_1_A: D1_1.A R2_1.2 | length 104.6
  Bottom Layer w10: R2_1.2 147.98,-206 D1_1.A
NetD1_2_A: D1_2.A R2_2.2 | length 114.1
  Bottom Layer w10: R2_2.2 -210.02,-217 D1_2.A
NetM-_0: M-.0 R6_2.1 U1.1 | length 2143.2
  MidLayer1 w6: v1(-314,123) -314,466 -50,730 50.23,730 92.5,687.73 92.5,687.5 395.5,384.5 395.5,29.73 380,14.23 v1(380,-31)
  Bottom Layer w6: v1(380,-31) 410.77,-31 468,-88.23 468,-380 v1@459,-389
  other v1: 447,-392
NetQ1_1_G: Q1_1.G R3_1.2 U4_1.1 U4_1.5 | length 706.4
  MidLayer2 w10: Q1_1.G 181.16,504.84 222,464 222,224 v2(205,207)
  Bottom Layer w10: v2(205,207) 248.2,163.8 287.36,163.8 319.39,131.77 325.64,131.77 366.41,91 R3_1.2
NetQ1_2_G: Q1_2.G R3_2.2 U4_2.1 U4_2.5 | length 696.6
  MidLayer2 w10: v2(101,179) 140,140 282,140 489.74,347.74 Q1_2.G
  Bottom Layer w10: R3_2.2 48,126 v2(101,179)
NetQ2_1_G: Q2_1.G R4_1.2 U6_1.1 U6_1.5 | length 598.5
  MidLayer2 w10: Q2_1.G -304.81,561 -158,561 15,388 v2(10,388)
  Bottom Layer w10: v2(10,388) 15,388 111,292 R4_1.2@111,291.5
NetQ2_2_G: Q2_2.G R4_2.2 U6_2.1 U6_2.5 | length 525.4
  Top Layer w10: Q2_2.G -643.79,152 -635,152 -635,107.4 -608.88,81.28 -608.88,-82.12 v2(-500,-191)
  Bottom Layer w10: v2(-500,-191) -486.5,-191 R4_2.2
NetR1_1: R1.1 U3.35 | length 206.5
  Top Layer w6: R1.1 -272.32,-583.82 -146.57,-583.82 -141.34,-589.06 U3.35
NetR3_1_1: R3_1.1 U5_1.7 | length 168.8
  Bottom Layer w10: U5_1.7 198,107.25 238.55,147.8 257.45,147.8 310.5,94.75 R3_1.1
NetR3_2_1: R3_2.1 U5_2.7 | length 165.7
  Bottom Layer w10: U5_2.7 -118.81,148.68 -118.81,162.44 -105.45,175.8 -86.55,175.8 -36.75,126 R3_2.1
NetR4_1_1: R4_1.1 U5_1.4 | length 320.6
  Bottom Layer w10: U5_1.4 98,29.74 120.81,52.55 120.81,142.32 137,158.5 137,209
NetR4_2_1: R4_2.1 U5_2.4 | length 231.4
  Bottom Layer w10: R4_2.1 -406.94,-83.5 -372.26,-118.19 -325.74,-118.19 -275.04,-67.48 U5_2.4
NetU3_14: U3.14 U5_1.2 | length 599.7
  Top Layer w6: U3.14 146.77,-530 156.27,-539.5 187.5,-539.5 v1(211,-516)
  MidLayer1 w6: v1(211,-516) 204.77,-516 226.5,-494.27 226.5,-471.27 212.73,-457.5 212.14,-457.5 179.5,-424.86 179.5,-202.5 v1(221,-161)
  Bottom Layer w6: U5_1.2 198,-138 v1(221,-161)
NetU3_15: U3.15 U5_2.2 | length 739.4
  Top Layer w6: U3.15@108.08,-509.5 U3.15 160.31,-510.31 v1(166,-516)
  MidLayer1 w6: v1(-165,-129) -171,-129 -172,-128 -172,-136.77 -191.5,-156.27 -191.5,-175.85 -183.5,-183.85 -183.5,-194.73 -169.73,-208.5 -148.5,-208.5 17.5,-374.5 17.5,-376.73 156.77,-516 v1@159.5,-516
  Bottom Layer w6: v1(-165,-129) -156,-129 -151.99,-133.01 -159.49,-140.51 -172,-128 -146,-102 U5_2.2
NetU3_20: U3.20 U5_1.1 | length 421
  Top Layer w6: U3.20 58.06,-403.94 v1(87,-375)
  Bottom Layer w6: v1(87,-375) 194.49,-267.51 221.93,-267.51 227.2,-262.24 227.2,-201.35 248,-180.55 U5_1.1
NetU3_21: U3.21 U5_2.1 | length 478.8
  Top Layer w6: U3.21 38.37,-369.63 v1(41,-367)
  MidLayer1 w6: v1@-167,-165.5 -160.5,-165.5 v1(41,-367)
  Bottom Layer w6: v1(-168,-166.12) -166.97,-167.15 -166.79,-167.15 -165.97,-166.34 -165.97,-166.03 -167,-165 -96,-94 U5_2.1
NetU3_32: U3.32 U9.3 | length 644.9
  Top Layer w6: v1(-276,-390) -285,-381 -285,-335.91 -319.5,-301.41 -319.5,-279.27 -305.73,-265.5 -286.27,-265.5 -266.04,-285.73 -266.04,-303.26 -260.77,-308.53 -239.24,-308.53 -232.5,-315.27 -232.5,-334.73 -240.5,-342.73 -240.5,-392.3 -189.5,-443.3 -189.5,-473.7 -225.5,-509.7 -225.5,-542.73 -220.42,-547.82 -152.61,-547.82 -139.8,-535 -130.06,-535 -125.06,-530 U3.32
NetU3_33: U3.33 U9.4 | length 567.3
  Top Layer w6: v1(-296,-289) -296,-306 -278,-324 -257,-324 -252.5,-328.5 -252.5,-398.27 -201.5,-449.27 -201.5,-468.73 -237.5,-504.73 -237.5,-547.7 -225.39,-559.82 -146.82,-559.82 -136.68,-549.68 U3.33
  Bottom Layer w6: v1(-296,-289) -296,-313.91 -285,-324.91 -285,-344.79 -258.48,-371.31 U9.4
NetU3_34: U3.34 U9.1 | length 284.4
  Top Layer w6: -225,-458 -249.5,-482.5 -249.5,-552.68 -230.36,-571.82 -141.6,-571.82 -139.15,-569.37 U3.34
  Bottom Layer w6: U9.1 -240,-441.95 v1(-240,-456)
NJTRST: P1.5 U3.31 | length 887.2
  Top Layer w6: v1(-202,-524) -197,-529 -194,-529 -189,-524 -186.23,-524 -175.73,-534.5 -156.27,-534.5 -144.77,-523 -135.03,-523 -122.34,-510.31 U3.31
  Bottom Layer w6: P1.5 -549,-310.31 -549,-402 -338,-613 -306.73,-613 -225.23,-694.5 -186.27,-694.5 -172.5,-680.73 -172.5,-556.5 -189,-540 -189,-524 -194,-529 -197,-529 v1(-202,-524)
VIN: C11.1 C13.+ C19.1 C20.+ Q1_1.D Q1_2.D R6_3.1 U7.4 U7.5 U8.4 U8.5 V+.0 | length 1557.3
  Top Layer w6: R6_3.1 551.5,-192 657,-192 702,-147 702,-20
  Top Layer w30: U7.5 U7.4 -216.23,-14.78 C11.1 ; U8.5 U8.4 183.77,-17.78 C19.1
  Top Layer w51.18: C11.1 -202.45,29.9 -172.23,60.12 164.88,60.12 197.55,27.45 197.55,26.9 ; C19.1 197.55,26.9 ; 415,92 366.82,92 ; 514,92 366.82,92 ; 197.55,26.9 262.65,92 366.82,92
  Bottom Layer w68.9: C13.+ V+.0@600,0
pads on no net: U1.6 U1.7 U1.8 U1.9 U1.10 U2.1 U3.3 U3.4 U3.17 U3.22 U3.23 U3.24 U9.5 U9.9

## Polygon pours and split planes (outlines as drawn)
3V3 on MidLayer1 "pwr_layer" (solid, remove dead copper, pour order 13): -943,-788 935,-788 935,55 -943,55 -943,-788
GND on MidLayer2 "gnd_layer" (solid, remove dead copper, pour order 14): -786,55 1006,55 1006,-857 -786,-857 -786,55
NetB_0 on Bottom Layer "B_strength" (solid, remove dead copper, pour order 15): -25,-455.32 -25,-745.32 -175,-745.32 -175,-455.32
NetA_0 on Bottom Layer "A_strength" (solid, remove dead copper, pour order 16): 175.17,-449.38 175.17,-739.38 25.17,-739.38 25.17,-449.38
NetM-_0 on Bottom Layer "M-_solder_pad" (solid, remove dead copper, pour order 23): -288,300 -503,300 -503,-7 -288,-7
NetC6_1_2 on Bottom Layer "M+_solder_pad" (solid, remove dead copper, pour order 24): 492,213 341,213 341,499 341,500 492.13,500 504,500 504,229
VIN on Top Layer "vin_to_fets" (solid, remove dead copper, pour order 21): 1003,-49 459,-49 158,561 178,1232
NetQ2_1_G on Top Layer "Q2_1_therm" (solid, remove dead copper, pour order 19): -454,691 -454,604.57 -356.5,507.07 -302,561.56 -302,628 -372,698 -400,698
NetQ1_1_G on Top Layer "Q1_1_therm" (solid, remove dead copper, pour order 17): 104,779 104,616 182,616 234,668 234,755
NetQ1_2_G on Top Layer "Q1_2_therm" (solid, remove dead copper, pour order 18): 734,448 593.57,448 505.07,359.5 561.21,303.36 609.78,303.36 630.36,303.36 699,372
NetQ2_2_G on Top Layer "Q2_2_therm" (solid, remove dead copper, pour order 20): -759,97 -612,97 -612,184 -612,187 -653,228 -657,232 -768,232
GND on Top Layer "gnd_to_fets" (solid, remove dead copper, pour order 22): -878,112 -605,112 -605,-53 -465,-53 -122,545 -122,930 -343,799 -239,638 -381,376 -467,448 -442,518 -708,749

## Keep-outs
Keep-Out Layer:
  the board outline again, w3

## Other copper
Bottom Layer:
  rectangle net VIN: 525,-155 675,135
  rectangle net GND: -675,-155 -525,135
  region net NetC6_2_2: -527,286 -289,286 -289,499 -366,502

## Silkscreen, mask and mechanical layers (free items; w line width, h text height)
Top Overlay:
  circle w10: c0,0 r250
Bottom Overlay:
  circle w10: c0,0 r140
  text "Sub8" at 692,-200 h45
  text "Motor" at 670,-270 h45
  text "Driver" at 640,-340 h45
  text "Forrest" at 565,-445 h45
  text "Voight" at 525,-515 h45
  text "Rev 1" at 375,-620 h45
Mechanical 1:
  region: 687,78 601,-223 515.5,-328 263,-332 221,-161 181,66